# EAGLE board headstage-neuropix_via-reduce (EAGLE 8.3.2), part 1 of 2
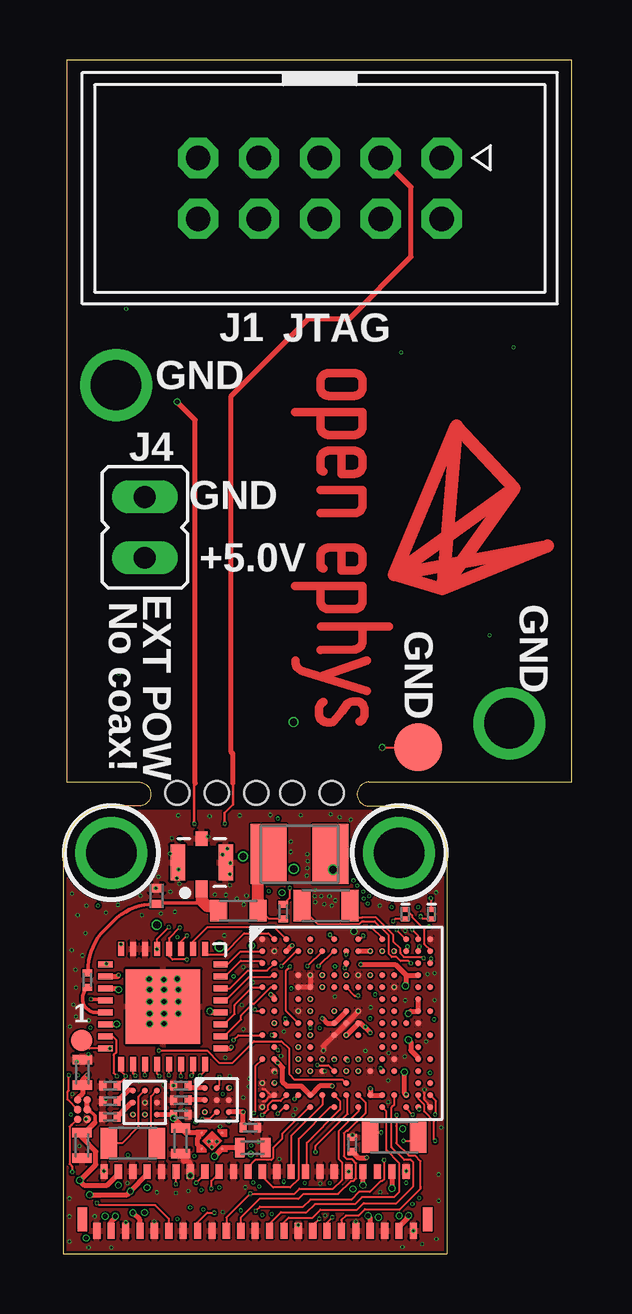
[diagram p0: board, top side]
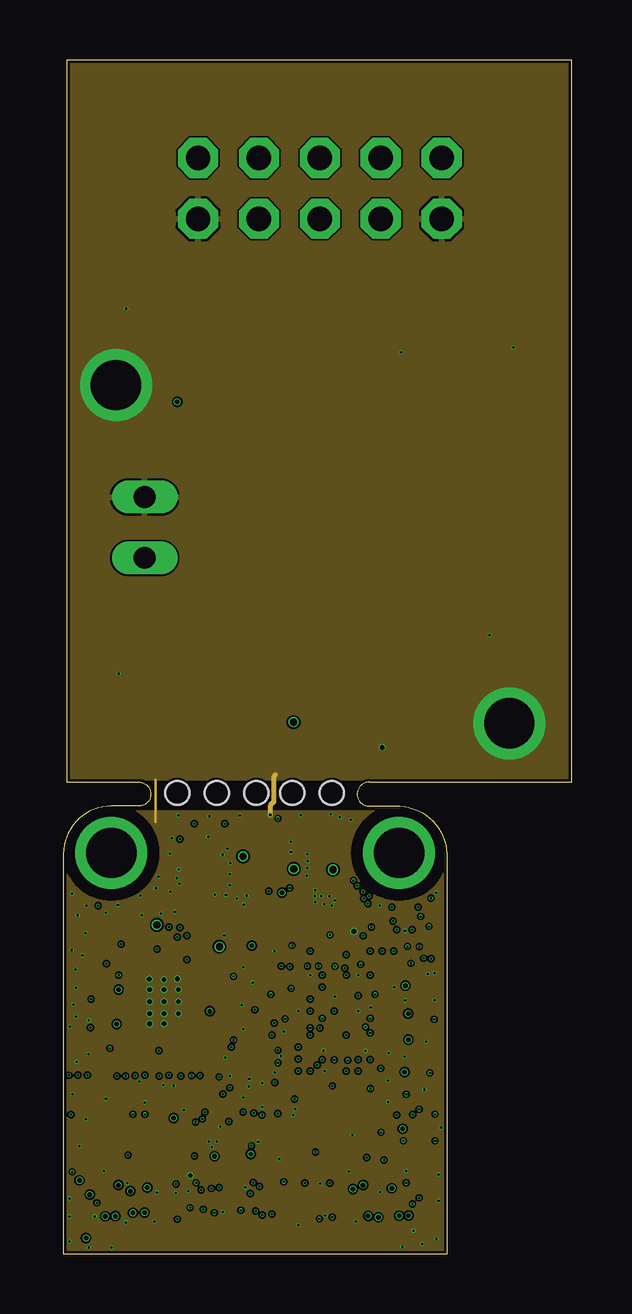
[diagram p1: board, inner layer GND1]
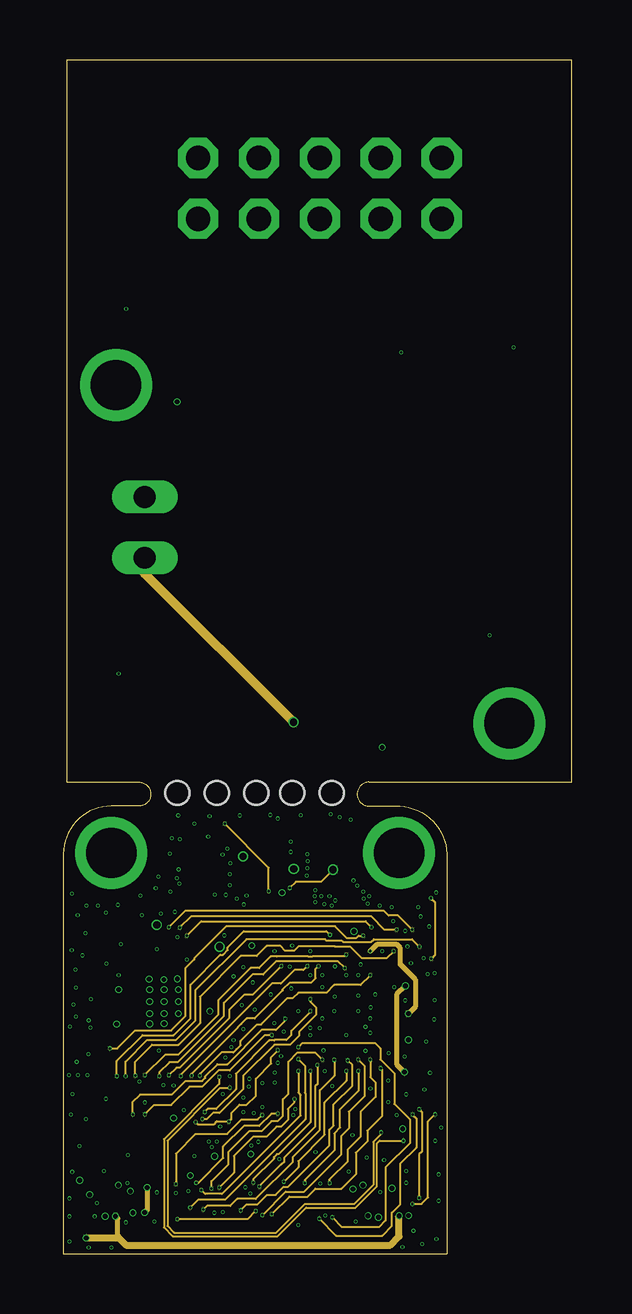
[diagram p2: board, inner layer Highspeed2]
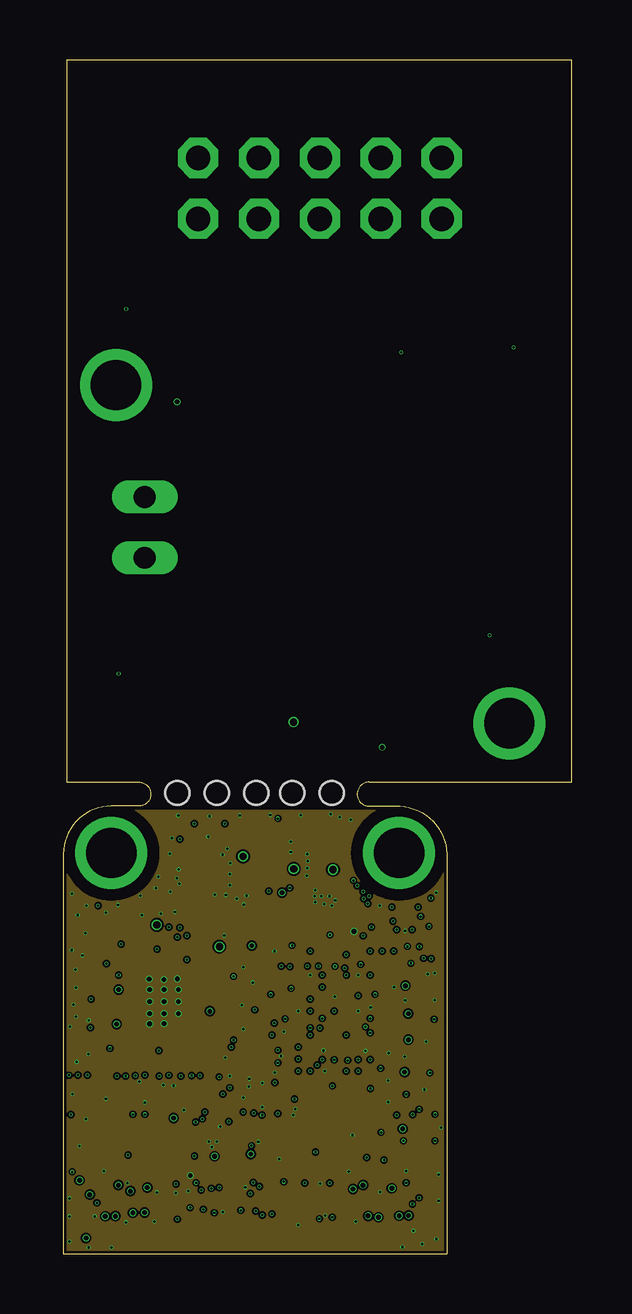
[diagram p3: board, inner layer GND2]
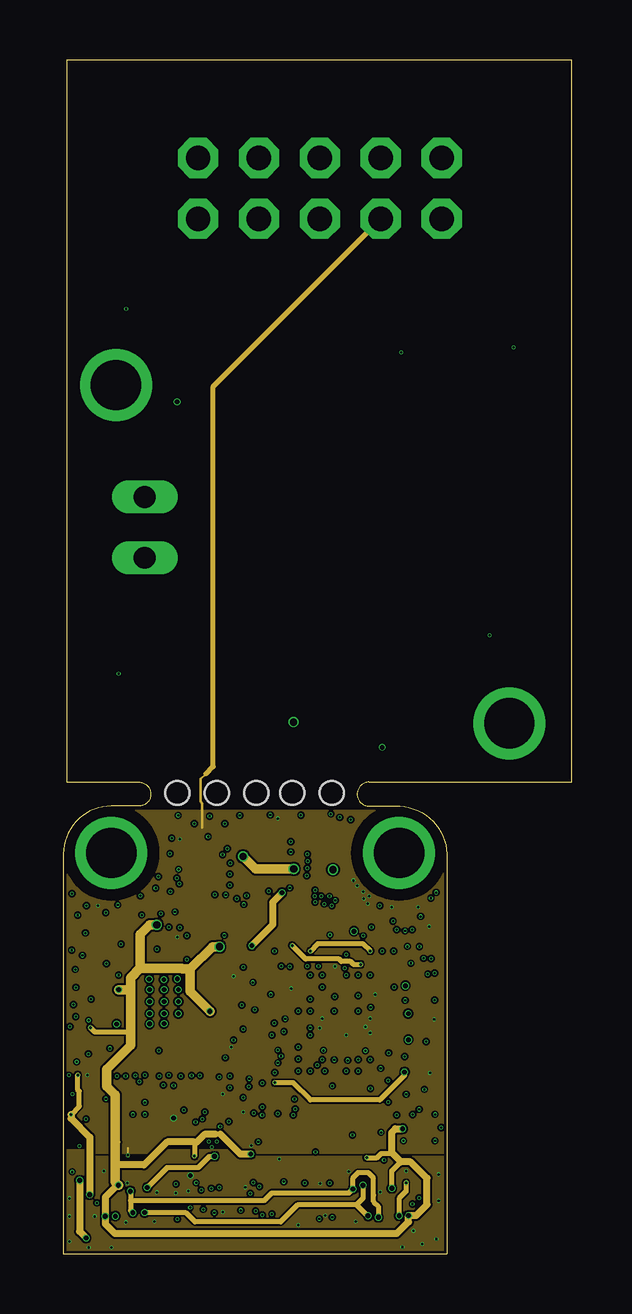
[diagram p4: board, inner layer VCC]
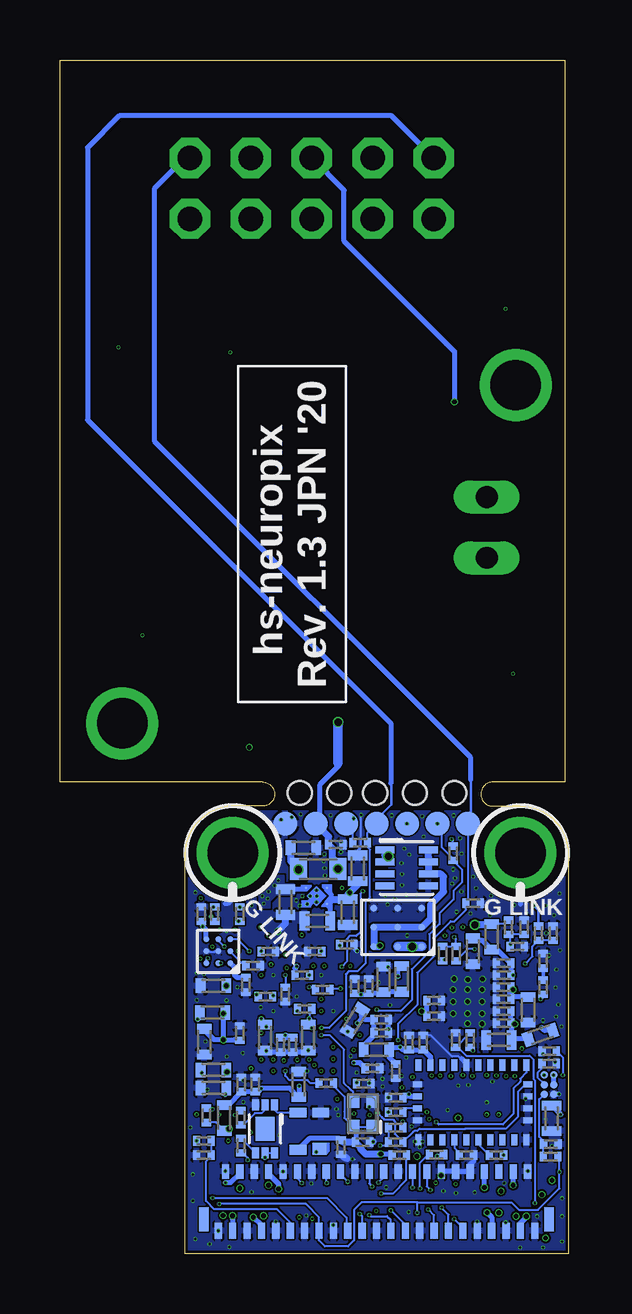
[diagram p5: board, bottom side, seen from below]

Size 21.2 x 49.75 mm. Coordinates in mm from the lower left corner, seen from the top.
Outline: 0.15,49.75 0.15,19.65 3.15,19.65 arc-90 3.65,19.15 arc-90 3.15,18.65 2,18.65 arc90 0,16.65 0,0 16,0 16,16.65 arc90 13.85,18.65 12.75,18.65 arc-90 12.25,19.15 arc-90 12.75,19.65 21.2,19.65 21.2,49.75 0.15,49.75
Copper layers (1*2*3+4*5*16): Highspeed1 0.036mm / dielectric 4mil / GND1 0.036mm / dielectric 5mil / Highspeed2 0.036mm / dielectric 0.10921875mm / GND2 0.036mm / dielectric 5mil / VCC 0.036mm / dielectric 4mil / LowSpeed 0.036mm
Design rules "speedy-6-layer-3mil-trace-space *": minimum track width 3mil, minimum drill 3mil, track to track 3mil, track to pad 3mil, pad to pad 3mil, via to via 3mil, smd to smd 2mil, copper to edge 5mil, drill to drill 5mil, minimum pad ring 2mil, minimum via ring 1mil, stop-mask expansion 0.005mm, vias tented up to drill 1mm, thermal gap 0.1mm
Net classes: 1 diff: width 0.09 mm, drill 0.2 mm, clearance 0.09 mm
Holes 1 mm at 8.05,19.2 4.75,19.2 6.4,19.2 9.55,19.2 11.2,19.2
tKeepout: area 12,14.7 to 16,18.7; area 0,14.7 to 4,18.7
bKeepout: area 11.9,14.6 to 16.1,18.8; area -0.1,14.6 to 4.1,18.8
tRestrict: area -0.1,14.6 to 4.1,18.8; area 11.9,14.6 to 16.1,18.8
bRestrict: area -0.1,14.6 to 4.1,18.8; area 11.9,14.6 to 16.1,18.8
vRestrict: area 11.9,14.6 to 16.1,18.8

## Footprints (pad centres in the part's own frame; a part is rotated, then mirrored left to right if it is on the bottom)
0201T = smd 0.3 x 0.4: 1 -0.3,0; 2 0.3,0
0402T = smd 0.4 x 0.6: 1 -0.533,0; 2 0.533,0
0402TW = smd 0.4 x 0.8: 1 -0.533,0; 2 0.533,0
LED-0201T = smd 0.2 x 0.35: 1 -0.2,0; 2 0.2,0
0402T-DFN = smd 0.35 x 0.6: A -0.325,0; C 0.325,0
0805PT-NOSILK = smd 0.7 x 1.3: A -1,0; C 1,0
2X05_IDC = drill 1.016 pad 1.676 octagon: 1 -5.08,-1.27; 2 -5.08,1.27; 3 -2.54,-1.27; 4 -2.54,1.27; 5 0,-1.27; 6 0,1.27; 7 2.54,-1.27; 8 2.54,1.27; 9 5.08,-1.27; 10 5.08,1.27
X_FL_R_SMT_1(02) = smd 0.5 x 0.7: P$1 0,-1.1 | smd 0.6 x 1.5: P$2 -1,0; P$4 1,0 | smd 0.5 x 0.6: P$3 0,1
1-2013496-8 = smd 0.3 x 0.65: 1 -6.6,0; 3 -6,0; 5 -5.4,0; 7 -4.8,0; 9 -4.2,0; 11 -3.6,0; 13 -3,0; 15 -2.4,0; 17 -1.8,0; 19 -1.2,0; 21 -0.6,0; 23 0,0; 25 0.6,0; 27 1.2,0; 29 1.8,0; 31 2.4,0; 33 3,0; 35 3.6,0; 37 4.2,0; 39 4.8,0; 41 5.4,0; 43 6,0; 45 6.6,0 | smd 0.3 x 0.6: 2 -6.3,2.475; 4 -5.7,2.475; 6 -5.1,2.475; 8 -4.5,2.475; 10 -3.9,2.475; 12 -3.3,2.475; 14 -2.7,2.475; 16 -2.1,2.475; 18 -1.5,2.475; 20 -0.9,2.475; 22 -0.3,2.475; 24 0.3,2.475; 26 0.9,2.475; 28 1.5,2.475; 30 2.1,2.475; 32 2.7,2.475; 34 3.3,2.475; 36 3.9,2.475; 38 4.5,2.475; 40 5.1,2.475; 42 5.7,2.475; 44 6.3,2.475 | smd 0.4 x 1: MECH1 -7.2,0.475; MECH2 7.2,0.475
JP2 = drill 0.914 long: 1 0,0; 2 2.54,0
0603T = smd 0.7 x 0.9: 1 -0.82,0; 2 0.82,0
1210T = smd 1.5 x 2.5: 1 -1.3,0; 2 1.3,0
TP10R = smd 1 x 1: TP 0,0
TP09R = smd 0.9 x 0.9: TP 0,0
TP20R = smd 2 x 2: TP 0,0
MBGA153-8X8 = smd 0.25 x 0.25: A1 -3.5,3.5; A2 -3,3.5; A3 -2.5,3.5; A5 -1.5,3.5; A7 -0.5,3.5; A9 0.5,3.5; A11 1.5,3.5; A13 2.5,3.5; A14 3,3.5; A15 3.5,3.5; B1 -3.5,3; B2 -3,3; B3 -2.5,3; B4 -2,3; B5 -1.5,3; B6 -1,3; B7 -0.5,3; B8 0,3; B9 0.5,3; B10 1,3; B11 1.5,3; B12 2,3; B13 2.5,3; B14 3,3; B15 3.5,3; C1 -3.5,2.5; C2 -3,2.5; C8 0,2.5; C14 3,2.5; C15 3.5,2.5; D2 -3,2; D4 -2,2; D5 -1.5,2; D6 -1,2; D7 -0.5,2; D8 0,2; D9 0.5,2; D10 1,2; D11 1.5,2; D12 2,2; D14 3,2; E1 -3.5,1.5; E2 -3,1.5; E4 -2,1.5; E5 -1.5,1.5; E6 -1,1.5; E7 -0.5,1.5; E8 0,1.5; E9 0.5,1.5; E10 1,1.5; E11 1.5,1.5; E12 2,1.5; E14 3,1.5; E15 3.5,1.5; F2 -3,1; F4 -2,1; F5 -1.5,1; F11 1.5,1; F12 2,1; F14 3,1; G1 -3.5,0.5; G2 -3,0.5; G4 -2,0.5; G5 -1.5,0.5; G7 -0.5,0.5; G8 0,0.5; G9 0.5,0.5; G11 1.5,0.5; G12 2,0.5; G14 3,0.5; G15 3.5,0.5; H2 -3,0; H3 -2.5,0; H4 -2,0; H5 -1.5,0; H7 -0.5,0; H8 0,0; H9 0.5,0; H11 1.5,0; H12 2,0; H13 2.5,0; H14 3,0; J1 -3.5,-0.5; J2 -3,-0.5; J4 -2,-0.5; J5 -1.5,-0.5; J7 -0.5,-0.5; J8 0,-0.5; J9 0.5,-0.5; J11 1.5,-0.5; J12 2,-0.5; J14 3,-0.5; J15 3.5,-0.5; K2 -3,-1; K4 -2,-1; K5 -1.5,-1; K11 1.5,-1; K12 2,-1; K14 3,-1; L1 -3.5,-1.5; L2 -3,-1.5; L4 -2,-1.5; L5 -1.5,-1.5; L6 -1,-1.5; L7 -0.5,-1.5; L8 0,-1.5; L9 0.5,-1.5; L10 1,-1.5; L11 1.5,-1.5; L12 2,-1.5; L14 3,-1.5; L15 3.5,-1.5; M2 -3,-2; M4 -2,-2; M5 -1.5,-2; M6 -1,-2; M7 -0.5,-2; M8 0,-2; M9 0.5,-2; M10 1,-2; M11 1.5,-2; M12 2,-2; M14 3,-2; N1 -3.5,-2.5; N2 -3,-2.5; N8 0,-2.5; N14 3,-2.5; N15 3.5,-2.5; P1 -3.5,-3; P2 -3,-3; P3 -2.5,-3; P4 -2,-3; P5 -1.5,-3; P6 -1,-3; P7 -0.5,-3; P8 0,-3; P9 0.5,-3; P10 1,-3; P11 1.5,-3; P12 2,-3; P13 2.5,-3; P14 3,-3; P15 3.5,-3; R1 -3.5,-3.5; R2 -3,-3.5; R3 -2.5,-3.5; R5 -1.5,-3.5; R7 -0.5,-3.5; R9 0.5,-3.5; R11 1.5,-3.5; R13 2.5,-3.5; R14 3,-3.5; R15 3.5,-3.5
ASCO = smd 0.6 x 0.5: 1 -0.55,-0.4; 2 0.55,-0.4; 3 0.55,0.4; 4 -0.55,0.4
UDFN8-2X2 = smd 0.8 x 0.3: 1 -0.91,0.75; 2 -0.91,0.25; 3 -0.91,-0.25; 4 -0.91,-0.75; 5 0.91,-0.75; 6 0.91,-0.25; 7 0.91,0.25; 8 0.91,0.75
WLCSP6-1X1.2-LP = smd 0.305 x 0.305: A1 -0.2,0.4; A2 0.2,0.4; B1 -0.2,0; B2 0.2,0; C1 -0.2,-0.4; C2 0.2,-0.4
WQFN32-5X5-LP = smd 0.25 x 0.6: 1 1.75,2.4; 2 1.25,2.4; 3 0.75,2.4; 4 0.25,2.4; 5 -0.25,2.4; 6 -0.75,2.4; 7 -1.25,2.4; 8 -1.75,2.4; 17 -1.75,-2.4; 18 -1.25,-2.4; 19 -0.75,-2.4; 20 -0.25,-2.4; 21 0.25,-2.4; 22 0.75,-2.4; 23 1.25,-2.4; 24 1.75,-2.4 | smd 0.6 x 0.25: 9 -2.4,1.75; 10 -2.4,1.25; 11 -2.4,0.75; 12 -2.4,0.25; 13 -2.4,-0.25; 14 -2.4,-0.75; 15 -2.4,-1.25; 16 -2.4,-1.75; 25 2.4,-1.75; 26 2.4,-1.25; 27 2.4,-0.75; 28 2.4,-0.25; 29 2.4,0.25; 30 2.4,0.75; 31 2.4,1.25; 32 2.4,1.75 | smd 3.1 x 3.1: PAD 0,0
X2SON = smd 0.1 x 0.1: 1 -0.43,0.33; 2 -0.43,-0.33; 3 0.43,-0.33; 4 0.43,0.33 | smd 0.1 x 0.1 rotated 45: PAD 0,0
MICROSIP9-3X2.3 = smd 0.3 x 0.3: A1 -1,0.8; A2 0,0.8; A3 1,0.8; B1 -1,0; B2 0,0; B3 1,0; C1 -1,-0.8; C2 0,-0.8; C3 1,-0.8
LGA-28-3.8X2.5-LP = smd 0.25 x 0.475: 1 -2.25,1.56; 6 -2.25,-1.56; 7 -1.75,-1.56; 8 -1.25,-1.56; 9 -0.75,-1.56; 10 -0.25,-1.56; 11 0.25,-1.56; 12 0.75,-1.56; 13 1.25,-1.56; 14 1.75,-1.56; 15 2.25,-1.56; 20 2.25,1.56; 21 1.75,1.56; 22 1.25,1.56; 23 0.75,1.56; 24 0.25,1.56; 25 -0.25,1.56; 26 -0.75,1.56; 27 -1.25,1.56; 28 -1.75,1.56 | smd 0.375 x 0.25: 2 -2.3,0.75; 3 -2.3,0.25; 4 -2.3,-0.25; 5 -2.3,-0.75; 16 2.3,-0.75; 17 2.3,-0.25; 18 2.3,0.25; 19 2.3,0.75
VFLGA4-2.0X1.6 = smd 0.5 x 0.57: 1 -0.725,-0.425 | smd 0.4 x 0.7: 2 0.775,-0.475; 3 0.775,0.475; 4 -0.775,0.475
DFN6_2X1.3_PAD = smd 0.45 x 0.3: 1 -1,0.4; 2 -1,0; 3 -1,-0.4; 4 1,-0.4; 5 1,0; 6 1,0.4 | smd 1 x 0.8: PAD 0,0
WLCSP3X3 = smd 0.25 x 0.25: A1 -0.5,0.5; A2 0,0.5; A3 0.5,0.5; B1 -0.5,0; B2 0,0; B3 0.5,0; C1 -0.5,-0.5; C2 0,-0.5; C3 0.5,-0.5

## Placement (x,y rotation side)
C1  22nF  [0201T]  9.24,12.88 0 bottom
C2  22nF  [0201T]  11.5,8.7 270 bottom
C3  0.1uF  [0201T]  8.53,7.08 0 bottom
C4  0.1uF  [0201T]  12,8.7 270 bottom
C5  4.7uF  [0402T]  14.8,11.16 180 bottom
C6  4.7uF  [0402T]  12.65,9 270 bottom
C7  10uF  [0402T]  14.8,6.9 180 bottom
C8  10uF  [0402T]  10.85,9 270 bottom
C9  22nF  [0201T]  8.17,7.72 0 bottom
C10  22nF  [0201T]  13.7,9.19 90 bottom
C11  10nF  [0201T]  8.58,4.64 180 bottom
C12  22nF  [0201T]  8.32,11.15 90 bottom
C13  22nF  [0201T]  7.8,9.75 0 bottom
C14  22nF  [0201T]  13.64,7.05 90 bottom
C15  22nF  [0201T]  12.51,12.59 0 bottom
C16  0.1uF  [0201T]  8.91,11.14 90 bottom
C17  0.1uF  [0201T]  7.8,9.2 0 bottom
C18  0.1uF  [0201T]  13.05,7.05 90 bottom
C19  0.1uF  [0201T]  10.58,12.59 180 bottom
C20  10uF  [0402T]  8.9,9.72 238.2 bottom
C21  10uF  [0402T]  11.25,7.05 90 bottom
C22  10uF  [0402T]  15.18,8.83 270 bottom
C23  10uF  [0402T]  7.71,11.43 90 bottom
C24  10uF  [0402TW]  0.8,7.55 90 top
C25  1uF  [0201T]  9.7,17.05 0 bottom
C26  10uF  [0402TW]  9.2,14.23 270 bottom
C27  0.1uF  [0201T]  7.2,6.5 180 bottom
C28  10uF  [0402TW]  8.78,16.06 90 bottom
C29  0.1uF  [0201T]  6.05,8.8 90 bottom
C30  1nF  [0201T]  0.8,8.44 180 bottom
C31  0.1uF  [0201T]  5.6,10.55 0 bottom
C32  0.1uF  [0201T]  7.2,7.6 270 bottom
C33  10uF  [0402TW]  0.78,4.51 270 top
C34  10nF  [0201T]  5.6,9.9 0 bottom
C35  10nF  [0201T]  6.65,8.8 90 bottom
C36  10uF  [0402TW]  10.47,13.86 180 bottom
C37  10uF  [0402TW]  4.89,4.7 270 top
C38  1uF  [0201T]  0.73,4.56 0 bottom
C39  0.1uF  [0201T]  4.25,4.1 180 bottom
C40  10nF  [0201T]  2.7,12.1 180 bottom
C41  10nF  [0201T]  2.7,11.1 180 bottom
C42  10nF  [0201T]  2.7,10.1 180 bottom
C43  1nF  [0201T]  0.8,7.92 0 bottom
C44  0.1uF  [0201T]  2.7,11.6 180 bottom
C45  0.1uF  [0201T]  2.7,10.6 180 bottom
C46  0.1uF  [0201T]  2.7,9.6 180 bottom
C47  10uF  [0402TW]  11.8,14.65 270 bottom
C48  10uF  [0402TW]  7.9,4.42 0 top
C49  0.1uF  [0201T]  1,11.4 270 top
C50  47nF  [0201T]  1.05,11.1 270 bottom
C51  10uF  [0402TW]  0.7,5.64 270 bottom
C52  4.7uF  [0402T]  3.98,12.6 270 bottom
C53  10uF  [0402T]  1.68,10.16 270 bottom
C54  10uF  [0402TW]  2.9,8.9 180 bottom
C55  1uF  [0201T]  0.63,13.35 90 bottom
C56  10nF  [0201T]  9.48,4.43 90 bottom
C57  0.1uF  [0201T]  2.13,12.8 0 bottom
C58  10uF  [0402T]  11.05,16.91 0 bottom
C59  10nF  [0201T]  12.05,4.55 270 top
C60  1uF  [0201T]  1.95,6.35 180 top
C61  1uF  [0201T]  4.9,7 180 top
C62  1uF  [0201T]  13.45,11.2 270 bottom
C63  0.1uF  [0201T]  4.9,5.8 0 top
C64  0.1uF  [0201T]  7.8,5.25 0 top
C65  0.1uF  [0201T]  15.3,14.15 90 bottom
D1  XZVGR155W  [LED-0201T]  15.35,14.15 270 top
D2  XZVGR155W  [LED-0201T]  14.25,14.15 270 top
D3  SESD0402X1UN-0020-090  [0402T-DFN]  3.89,14.9 270 top
D4  VEMD1160X01  [0805PT-NOSILK]  2.9,4.6 0 top
D5  VEMD1160X01  [0805PT-NOSILK]  13.8,4.85 180 top
D6  VEMD1160X01  [0805PT-NOSILK]  10.95,14.5 0 top
J1  302-S101  [2X05_IDC]  10.7,44.4 180 top
J2  X.FL-R-SMT-1(02)  [X_FL_R_SMT_1(02)]  5.77,16.3 0 top
J3  1-2013496-8  [1-2013496-8]  8,0.95 0 top
J4  77311-118-02LF  [JP2]  3.4,29 90 top
J5  1-2013496-8  [1-2013496-8]  8,0.95 0 bottom
L1  BLM15PX601SN1D  [0402T]  14.8,7.65 0 bottom
L2  BLM15PX601SN1D  [0402T]  6.95,11.44 270 bottom
L3  BLM15PX601SN1D  [0402T]  8,8.5 180 bottom
L4  BLM15PX601SN1D  [0402T]  14.35,5.65 90 bottom
L5  BLM15PX601SN1D  [0402T]  14.84,10.05 0 bottom
L6  BLM15PX601SN1D  [0402T]  3.2,13.2 270 bottom
L7  BLM15PX601SN1D  [0402T]  1.16,9.12 198.9 bottom
L8  BLM18KG601SN1D  [0603T]  10.43,16.03 0 bottom
L9  ADL3225V-470MT-TL000  [1210T]  9.85,16.65 0 top
L10  MPZ1608S102ATA00  [0603T]  7.3,14.3 0 top
R1  4.7k  [0201T]  7.2,4.65 180 bottom
R2  4.7k  [0201T]  7.2,5.25 180 bottom
R3  2k  [0201T]  14.75,14.15 270 bottom
R4  4.7k  [0201T]  10.1,7.1 0 bottom
R5  10k  [0201T]  11,10.2 180 bottom
R6  2k  [0201T]  13.7,14.15 270 bottom
R7  4.7k  [0201T]  15.1,5.76 270 bottom
R8  10k  [0201T]  4.81,16.68 270 bottom
R9  1k  [0201T]  3.97,14.6 0 bottom
R10  4.7k  [0201T]  5.5,4.12 0 bottom
R11  4.7k  [0201T]  5.24,12.5 90 bottom
R12  10k  [0201T]  11.8,10.8 270 bottom
R13  10k  [0201T]  8.68,17.13 0 bottom
R14  4.7k  [0201T]  7.05,4.1 180 bottom
R15  4.7k  [0201T]  4.68,12.5 90 bottom
R16  10k  [0201T]  12.63,10.71 0 bottom
R17  10k  [0201T]  11.1,11.6 0 bottom
R18  10k  [0201T]  10.25,11 180 bottom
R19  10k  [0201T]  1.95,7 180 top
R20  10k  [0201T]  3,4.1 0 bottom
R21  6.6k  [0201T]  0.74,4.04 0 bottom
R22  10k  [0201T]  1.25,13.35 270 bottom
R23  49.9  [0201T]  1.05,12.2 270 bottom
R24  10k  [0201T]  7.2,5.9 0 bottom
R25  10k  [0201T]  2.5,13.6 270 bottom
R26  100k  [0201T]  1.85,13.6 90 bottom
R27  2k  [0201T]  9.17,14.25 90 top
R28  22  [0201T]  13.65,4.5 270 bottom
R29  20k  [0201T]  4.1,8.9 90 bottom
R30  100  [0201T]  4.7,8.9 90 bottom
R31  22  [0201T]  13.66,5.66 90 bottom
R32  15k  [0201T]  1.95,5.7 0 top
R33  15k  [0201T]  4.9,6.4 0 top
R34  15k  [0201T]  13.15,12 180 bottom
R35  20k  [0201T]  15.2,4.7 0 bottom
R36  100  [0201T]  15.2,4.1 180 bottom
TP1  [TP10R]  10.54,17.92 180 bottom
TP2  [TP10R]  5.46,17.92 180 bottom
TP3  [TP10R]  4.19,17.92 180 bottom
TP4  [TP10R]  8,17.92 180 bottom
TP5  [TP10R]  6.73,17.92 180 bottom
TP6  [TP10R]  9.27,17.92 180 bottom
TP7  [TP10R]  11.81,17.92 180 bottom
TP10  [TP09R]  0.76,8.88 0 top
TP13  [TP20R]  14.8,21.1 270 top
U1  10M08SAM15317G  [MBGA153-8X8]  11.8,9.6 0 top
U2  ASCO2-24.000MHZ-EK-T3  [ASCO]  8.57,5.83 90 bottom
U3  MAX4945AELA+T  [UDFN8-2X2]  6.74,16.07 0 bottom
U4  ADP7112ACBZ-1.8-R7  [WLCSP6-1X1.2-LP]  0.8,6 0 top
U5  DS90UB933_WQFN  [WQFN32-5X5-LP]  4.16,10.3 0 top
U6  NCP161BMX330  [X2SON]  10.5,14.9 0 bottom
U7  TPS8268180  [MICROSIP9-3X2.3]  7.11,13.6 180 bottom
U8  TLV70712  [X2SON]  6.2,4.7 180 top
U9  ADP7112ACBZ-1.2-R7  [WLCSP6-1X1.2-LP]  0.81,7.04 0 bottom
U10  BNO055_LP  [LGA-28-3.8X2.5-LP]  4,6.3 0 bottom
U11  DSC6102MI2A-093.6000  [VFLGA4-2.0X1.6]  10.8,5.1 90 bottom
U12  PL133-27GC-R  [DFN6_2X1.3_PAD]  12.65,5.2 270 bottom
U13  TS4231  [WLCSP3X3]  3.4,6.3 0 top
U14  TS4231  [WLCSP3X3]  6.4,6.4 0 top
U15  TS4231  [WLCSP3X3]  14.6,12.6 180 bottom
X2  OE-LOGO_14X10  [OE-LOGO-14X10]  13.4,30.1 270 top

## Library data of the parts
C1-C59 D1-D6 J1-J5 L1-L10 R1-R36 TP1-TP7 TP10 TP13 U1-U15 X2 = jonnew
C60-C62 = jonnew; PARTNO: CL03A105MP3ZSNH
C63-C65 = jonnew; PARTNO: C0603X5R1C104K030BC

## Nets
1V2A: C51.1 J3.7 J3.8 J5.7 J5.8 U9.A2 U9.B2
1V8A: C33.1 J3.3 J3.4 J5.3 J5.4 U4.A2 U4.B2
24MHZ_P: U1.J5 U2.3
!IMU_BL: R24.2 U10.4
!IMU_RESET: R20.1 U10.11
+1V2: C48.1 J3.38 J3.39 J5.38 J5.39 U8.1
+1V8: C11.2 C31.1 C34.1 C41.1 C45.1 C53.1 C56.2 C59.2 J3.42 J3.43 J5.42 J5.43 L4.1 L6.1 L7.1 R4.2 R7.2 R10.2 R14.2 R25.1 U2.1 U2.4 U5.11 U5.28 U7.A1 U7.A2 U11.4 U12.5 U12.6
+3V3: C2.1 C4.1 C6.1 C8.1 C24.1 C27.1 C29.1 C32.1 C35.1 C37.1 C47.1 C63.1 C64.1 C65.1 J1.4 L1.1 L2.1 L3.1 L5.1 R1.2 R2.2 R3.1 R5.1 R6.1 R8.1 R11.2 R13.1 R15.2 R16.1 R17.1 R18.1 R20.2 R22.1 R24.1 TP6.TP U1.G8 U1.H7 U1.H9 U1.J8 U4.A1 U5.25 U6.1 U8.3 U8.4 U9.A1 U10.3 U10.28 U13.C3 U14.C3 U15.C3
BNO_SCL: R1.1 U1.L1 U10.19
BNO_SDA: R2.1 U1.K2 U10.20
CAL_A_1KHZ: R29.1 U1.N8
CAL_B_1KHZ: R35.1 U1.P14
CAL_SIGNAL_A: J3.11 R29.2 R30.1
CAL_SIGNAL_A1: J5.11 R35.2 R36.1
CONF_DONE: R18.2 U1.E6
CONFIG_SEL: R12.1 U1.D8
GND: C1.2 C2.2 C3.2 C4.2 C5.2 C6.2 C7.2 C8.2 C9.2 C10.2 C11.1 C12.2 C13.2 C14.2 C15.2 C16.2 C17.2 C18.2 C19.2 C20.2 C21.2 C22.2 C23.2 C24.2 C25.2 C26.2 C27.2 C28.2 C29.2 C30.2 C31.2 C32.2 C33.2 C34.2 C35.2 C36.2 C37.2 C38.2 C39.1 C40.2 C41.2 C42.2 C43.2 C44.2 C45.2 C46.2 C47.2 C48.2 C51.2 C52.2 C53.2 C54.2 C55.2 C56.1 C57.2 C58.2 C59.1 C60.2 C61.2 C62.2 C63.2 C64.2 C65.2 D3.A J1.2 J1.10 J2.P$2 J2.P$3 J2.P$4 J3.1 J3.2 J3.5 J3.6 J3.9 J3.10 J3.13 J3.14 J3.17 J3.20 J3.23 J3.26 J3.29 J3.32 J3.34 J3.36 J3.37 J3.41 J3.44 J3.45 J4.2 J5.1 J5.2 J5.5 J5.6 J5.9 J5.10 J5.13 J5.14 J5.17 J5.20 J5.23 J5.26 J5.29 J5.32 J5.34 J5.36 J5.37 J5.41 J5.44 J5.45 R9.2 R12.2 R19.2 R23.1 R26.2 R30.2 R32.1 R33.1 R34.1 R36.2 TP7.TP TP13.TP U1.A1 U1.A15 U1.B2 U1.D4 U1.D5 U1.D9 U1.E4 U1.E5 U1.E12 U1.G4 U1.G9 U1.H8 U1.H14 U1.J7 U1.L12 U1.M2 U1.M6 U1.M10 U1.N1 U1.P2 U1.R1 U1.R15 U2.2 U3.5 U4.C2 U5.6 U5.7 U5.PAD U6.2 U6.PAD U7.C1 U7.C2 U7.C3 U8.2 U8.PAD U9.C2 U10.2 U10.5 U10.6 U10.15 U10.16 U10.17 U10.18 U10.25 U11.2 U12.3 U13.B2 U13.B3 U14.B2 U14.B3 U15.B2 U15.B3
I2C_SCL_A: J3.19 R14.1 U1.R9
I2C_SCL_B: J5.19 R7.1 U1.R14
I2C_SDA_A: J3.18 R10.1 U1.L6
I2C_SDA_B: J5.18 R4.1 U1.M8
JTAGEN: R5.2 U1.G7
LH_DATA0: U1.G5 U14.C1
LH_DATA1: U1.H3 U13.C1
LH_DATA2: U1.B11 U15.C1
LH_ENV0: U1.F5 U14.C2
LH_ENV1: U1.J2 U13.C2
LH_ENV2: U1.B13 U15.C2
MIDFILT: L9.1 L10.2 R27.1
N$1: U11.3 U12.1
N$2: R28.1 U12.4
N$3: J3.35 R31.2
N$4: C13.1 C17.1 C20.1 L3.2 U1.H2
N$5: J5.35 R28.2
N$6: R31.1 U12.2
N$7: D4.C U13.A3
N$8: D4.A U13.A2
N$9: R32.2 U13.B1
N$12: C60.1 U13.A1
N$13: C58.1 L8.1 L9.2 R27.2
N$14: D5.C U14.A3
N$15: D5.A U14.A2
N$16: R33.2 U14.B1
N$26: D6.C U15.A3
N$27: D6.A U15.A2
N$28: C49.2 U5.13
N$29: R34.2 U15.B1
N$30: C55.1 R22.2 U5.9
N$31: C50.2 U5.12
N$32: C50.1 R23.2
N$33: C57.1 R25.2 R26.1 U5.8
N$34: C40.1 C44.1 C52.1 L6.2 U5.10
N$35: C42.1 C46.1 C54.1 L7.2 U5.14
N$36: C61.1 U14.A1
N$37: C62.1 U15.A1
N$38: C26.1 C28.1 C36.1 U3.6 U3.7 U3.8 U6.3 U6.4 U7.A3 U7.B1 U7.B2 U7.B3
N$39: C30.1 U4.B1
N$40: C43.1 U9.B1
N$41: C38.1 R21.1 U9.C1
N$67: C39.2 U10.9
N$92: D2.2 R6.2
N$93: D1.2 R3.2
NCONFIG: R16.2 U1.E8
NP_OSC_EN: U1.P8 U11.1
NRST: J3.15 J5.15 R21.2 U1.P15 U4.C1
NSTATUS: R17.2 U1.D6
OSC_PDOWN_N_A: J3.12 U1.P3
OSC_PDOWN_N_B: J5.12 U1.L10
PSB_CLK_A: J3.33 U1.K4
PSB_CLK_B: J5.33 U1.L4
PSB_DATA_0_A: J3.31 U1.R13
PSB_DATA_0_B: J5.31 U1.L7
PSB_DATA_1_A: J3.30 U1.P7
PSB_DATA_1_B: J5.30 U1.M4
PSB_DATA_2_A: J3.28 U1.P6
PSB_DATA_2_B: J5.28 U1.P4
PSB_DATA_3_A: J3.27 U1.P12
PSB_DATA_3_B: J5.27 U1.L8
PSB_DATA_4_A: J3.25 U1.R11
PSB_DATA_4_B: J5.25 U1.L9
PSB_DATA_5_A: J3.24 U1.R7
PSB_DATA_5_B: J5.24 U1.M5
PSB_DATA_6_A: J3.22 U1.R5
PSB_DATA_6_B: J5.22 U1.M7
PSB_SYNC_A: J3.21 U1.P9
PSB_SYNC_B: J5.21 U1.M11
REC_NRST_A: J3.16 U1.R3
REC_NRST_B: J5.16 U1.M9
SER_DIN0: U1.B8 U5.19
SER_DIN1: U1.C8 U5.20
SER_DIN2: U1.B4 U5.21
SER_DIN3: U1.B6 U5.22
SER_DIN4: U1.B7 U5.23
SER_DIN5: U1.D10 U5.24
SER_DIN6: U1.E2 U5.26
SER_DIN7: U1.E1 U5.27
SER_DIN8: U1.D2 U5.29
SER_DIN9: U1.C2 U5.30
SER_DIN10: U1.C1 U5.31
SER_DIN11: U1.B1 U5.32
SER_GPIO0: U1.A7 U5.15
SER_GPIO1: TP10.TP U1.A9 U5.16
SER_GPIO2: R19.1 U1.B14 U5.17
SER_GPIO3: U1.B12 U5.18
SER_HSYNC: U1.A2 U5.1
SER_PCLK: U1.A11 U5.3
SER_SCL: R11.1 U1.A13 U5.4
SER_SDA: R15.1 U1.A14 U5.5
SER_VSYNC: U1.A3 U5.2
SIGOUT: C49.1 D3.C J2.P$1 L10.1
STATUS_A: D1.1 U1.C15
STATUS_B: D2.1 U1.B15
TCK: J1.1 R9.1 TP3.TP U1.J1
TDI: J1.9 R13.2 TP4.TP U1.H5
TDO: J1.3 TP5.TP U1.H4
TMS: J1.5 R8.2 TP2.TP U1.G1
VCCA: C1.1 C3.1 C5.1 C7.1 L1.2 U1.B3 U1.D14 U1.N2 U1.P13
VCCIO: C10.1 C15.1 C19.1 C22.1 L5.2 U1.B5 U1.B9 U1.B10 U1.F14 U1.G14 U1.L14
VCCIO2: C9.1 C14.1 C18.1 C21.1 L4.2 U1.L2 U1.P5 U1.P10 U1.P11
VCCIOA: C12.1 C16.1 C23.1 L2.2 U1.F2
VCOAX: C25.1 J4.1 L8.2 TP1.TP U3.1 U3.2

## Tracks (layer width: path | path; a pad name or v marks a point on that pad's centre or on a via)
1V2A  (via drill 0.1, 0.2)
  Highspeed1 0.2: J3.8 3.5,3.3 v2.8,2.6 2.65,2.45 v1.1,2.45 | J3.7 3.2,1.4 v2.9,1.7
  VCC 0.2: v2.8,2.6 2.8,2.2 | U9.A2 0.61,6.82 0.67,6.76 0.67,6.14 v0.32,5.79 | 2.8,2.2 8.37,2.2 8.7,2.53 11.91,2.53 v12.08,2.69 12.08,3.16 12.29,3.37 12.71,3.37 12.93,3.15 12.93,2.46 12.94,2.45 12.94,2.16 13.14,1.96 v13.14,1.51 | 2.8,2.2 2.8,1.8 v2.9,1.7
  VCC 0.3: v1.1,2.45 1.1,4.85 0.32,5.63 v0.32,5.79
  LowSpeed 0.2: U9.B2 U9.A2 | v0.32,5.79 C51.1 | J5.7 12.8,1.17 v13.14,1.51 | J5.8 12.5,3.33 12.08,2.91 v12.08,2.69
  other vias: 0.61,7.44
  pour VCC (no thermals): 2.67,2.6 arc180 2.93,2.6 arc180
  pour Highspeed1 (no thermals): 2.67,2.6 arc180 2.93,2.6 arc180
  pour Highspeed1 (no thermals): 2.67,2.6 arc180 2.93,2.6 arc180
  pour Highspeed1 (no thermals): 2.77,1.7 arc180 3.03,1.7 arc180
  pour VCC (no thermals): 2.77,1.7 arc180 3.03,1.7 arc180
  pour LowSpeed (no thermals): 13.01,1.51 arc180 13.27,1.51 arc180
  pour VCC (no thermals): 13.01,1.51 arc180 13.27,1.51 arc180
  pour VCC (no thermals): 11.95,2.69 arc180 12.21,2.69 arc180
  pour LowSpeed (no thermals): 11.95,2.69 arc180 12.21,2.69 arc180
  pour VCC (no thermals): 11.95,2.69 arc180 12.21,2.69 arc180
  pour LowSpeed (no thermals): 0.24,5.79 arc180 0.4,5.79 arc180
  pour VCC (no thermals): 0.24,5.79 arc180 0.4,5.79 arc180
  pour VCC (no thermals): 0.24,5.79 arc180 0.4,5.79 arc180
  pour VCC (no thermals): 0.98,2.45 arc180 1.23,2.45 arc180
  pour Highspeed1 (no thermals): 0.98,2.45 arc180 1.23,2.45 arc180
  pour LowSpeed (no thermals): 0.53,7.44 arc180 0.69,7.44 arc180
  pour VCC (no thermals): 0.53,7.44 arc180 0.69,7.44 arc180
1V8A  (via drill 0.1, 0.2)
  Highspeed1 0.15: 1.33,5.46 1.33,5.74 1.07,6
  Highspeed1 0.2: 1.33,5.46 0.91,5.04 C33.1 0.78,4.83 1.36,4.25 1.36,3.7 0.7,3.05 v0.68,3.05 0.9,2.83 1.24,2.83 1.8,2.83 2.3,3.33 J3.4 | U4.A2 U4.B2 1.07,6 | J3.3 2,1.34 2.18,1.51 v2.18,1.56
  Highspeed2 0.2: 2.27,0.7 2.27,1.47 v2.18,1.56
  Highspeed2 0.3: v14,1.57 14,0.71 13.64,0.35 2.62,0.35 2.27,0.7 2.22,0.65 v0.95,0.65
  VCC 0.2: v14,1.57 14,2.3 14.29,2.59 v14.29,2.95
  VCC 0.3: v0.95,0.65 0.68,0.92 v0.68,3.05
  LowSpeed 0.2: 14,1.43 J5.3 | 14,1.43 14,1.52 | v14.29,2.95 14.08,2.95 13.7,3.33 J5.4 | v14,1.57 14,1.43
  pour Highspeed1 (no thermals): 0.55,3.05 arc180 0.81,3.05 arc180
  pour Highspeed1 (no thermals): 0.55,3.05 arc180 0.81,3.05 arc180
  pour VCC (no thermals): 0.55,3.05 arc180 0.81,3.05 arc180
  pour VCC (no thermals): 0.82,0.65 arc180 1.08,0.65 arc180
  pour Highspeed2 (no thermals): 0.82,0.65 arc180 1.08,0.65 arc180
  pour Highspeed2 (no thermals): 13.88,1.57 arc180 14.13,1.57 arc180
  pour VCC (no thermals): 13.88,1.57 arc180 14.13,1.57 arc180
  pour LowSpeed (no thermals): 13.88,1.57 arc180 14.13,1.57 arc180
  pour Highspeed1 (no thermals): 2.05,1.56 arc180 2.3,1.56 arc180
  pour Highspeed2 (no thermals): 2.05,1.56 arc180 2.3,1.56 arc180
  pour VCC (no thermals): 14.22,2.95 arc180 14.37,2.95 arc180
  pour LowSpeed (no thermals): 14.22,2.95 arc180 14.37,2.95 arc180
24MHZ_P  (via drill 0.1)
  LowSpeed 0.076: U1.J5 9.95,9.1 9.36,8.51 9.36,7.1 9.09,6.84 9.09,6.83 8.97,6.71 U2.3
  other vias: 10.3,9.1
  pour LowSpeed (no thermals): 10.22,9.1 arc180 10.38,9.1 arc180
!IMU_BL
  LowSpeed 0.076: U10.4 6.75,6.05 R24.2
!IMU_RESET
  LowSpeed 0.076: U10.11 3.75,4.55 R20.1
+1V2  (via drill 0.2)
  Highspeed1 0.076: 6.86,4.42 6.81,4.37 U8.1
  Highspeed1 0.2: v12.5,2.85 J3.38 | 6.86,4.42 C48.1 | U8.1 v6.31,4.05 | J3.39 12.8,1.48 v12.71,1.57
  Highspeed2 0.2: v3.39,1.71 3.5,1.82 v3.5,2.75
  VCC 0.2: v6.31,4.05 6.1,4.05 5.62,3.58 4.33,3.58 v3.5,2.75 | v3.39,1.71 5.1,1.71 5.5,1.31 9.06,1.31 9.78,2.03 12.22,2.03 | v12.71,1.57 12.68,1.57 12.22,2.03 | v12.5,2.85 12.5,2.31 12.22,2.03
  LowSpeed 0.2: v3.5,2.75 J5.38 | J5.39 3.2,1.52 v3.39,1.71
  pour Highspeed1 (no thermals): 12.58,1.57 arc180 12.84,1.57 arc180
  pour VCC (no thermals): 12.58,1.57 arc180 12.84,1.57 arc180
  pour Highspeed2 (no thermals): 3.26,1.71 arc180 3.52,1.71 arc180
  pour LowSpeed (no thermals): 3.26,1.71 arc180 3.52,1.71 arc180
  pour VCC (no thermals): 3.26,1.71 arc180 3.52,1.71 arc180
  pour LowSpeed (no thermals): 3.37,2.75 arc180 3.63,2.75 arc180
  pour Highspeed2 (no thermals): 3.37,2.75 arc180 3.63,2.75 arc180
  pour VCC (no thermals): 3.37,2.75 arc180 3.63,2.75 arc180
  pour Highspeed1 (no thermals): 12.37,2.85 arc180 12.63,2.85 arc180
  pour VCC (no thermals): 12.37,2.85 arc180 12.63,2.85 arc180
  pour Highspeed1 (no thermals): 6.18,4.05 arc180 6.44,4.05 arc180
  pour VCC (no thermals): 6.18,4.05 arc180 6.44,4.05 arc180
+1V8  (via drill 0.1, 0.2, 0.3)
  Highspeed1 0.2: U5.28 6.16,10.05 v6.11,10.1 | U5.11 2.31,11.05 v2.31,11 | J3.42 v13.7,2.72 | C59.2 12.3,4 v12.65,4 | v14.4,1.58 14.33,1.51 14.33,1.44 14,1.11 J3.43
  VCC 0.2: 5.45,4.65 5.47,4.63 v5.47,4.06 | 6.35,4.99 6.54,4.99 6.55,4.97 | 2.78,8.9 2.81,8.87 | v1.13,9.42 1.31,9.23 2.73,9.23 2.81,9.31 | v12.65,4 13.08,4 13.26,4.17 13.68,4.17 13.7,4.19 | v13.7,2.72 13.7,3.45 14.07,3.82
  VCC 0.3: v14.15,5.2 13.85,5.2 13.7,5.05 13.7,4.19 14.07,3.82 14.48,3.82 15.16,3.14 15.16,2.03 14.71,1.58 v14.4,1.58 14.4,1.32 13.91,0.83 2.15,0.83 1.75,1.23 v1.75,1.55 1.75,2.35 2.25,2.85 v2.3,2.85 | v7.82,4.15 7.37,4.15 6.55,4.97 | 6.35,4.99 5.92,4.99 5.58,4.65 5.45,4.65 4.33,4.65 3.37,3.69 2.16,3.69 | 2.23,4.65 2.16,4.72
  VCC 0.4: 2.81,11 2.81,11.5 3.21,11.9 | 2.81,11 2.81,9.31 2.81,8.87 2.81,8.68 1.8,7.67 1.8,6.96 2.16,6.61 2.16,4.72 2.16,3.69 2.16,2.99 v2.3,2.85 | v2.31,11 2.81,11 | 3.21,11.9 3.21,13.31 3.6,13.7 v3.9,13.7 | 5.29,11.87 5.29,10.92 v6.11,10.1 | 5.29,11.87 5.3,11.88 5.31,11.88 6.22,12.79 v6.51,12.79 | 5.29,11.87 4.96,11.87 4.96,11.88 3.23,11.88 3.21,11.9
  LowSpeed 0.076: L4.1 14.69,5.46 R7.2 | R25.1 2.67,13.73 L6.1 | U2.1 8.84,5.28 U2.4 9.35,5.66 9.35,5.92 9.33,5.93 9.33,6.53 9.8,7 R4.2 | 8.85,4.67 C11.2 | U12.5 U12.6
  LowSpeed 0.15: 12.65,4.35 U12.5 | L4.1 14.17,5.12 14.15,5.1
  LowSpeed 0.2: 5.9,10.1 C31.1 | 5.9,10.1 C34.1 | v6.11,10.1 5.9,10.1 | v2.3,2.85 J5.42 | v7.82,4.15 7.4,4.15 R14.2 | R10.2 5.26,4.06 v5.47,4.06 | U12.5 v12.65,4 | 2,0.85 J5.43 2,1.27 1.75,1.52 v1.75,1.55 | 8.85,5.16 U2.4 8.81,5.28 | C11.2 8.84,4.68 8.84,5.28 | C53.1 2.31,10.69 C45.1 | U11.4 10.8,4.8 9.55,4.8 C56.2 | L7.1 1,9.29 v1.13,9.42
  LowSpeed 0.203: C41.1 v2.31,11
  LowSpeed 0.3: L6.1 3.23,13.7 v3.9,13.7 | C45.1 C41.1 | L4.1 14.23,5.12 v14.15,5.2 | C56.2 9.39,4.64 C11.2 8.66,4.42 8.66,4.35 8.46,4.15 v7.82,4.15
  LowSpeed 0.4: 6.52,12.8 U7.A2 | 6.52,12.8 v6.51,12.79 | U7.A1 6.52,12.8
  pour Highspeed1 (no thermals): 5.99,10.1 arc180 6.24,10.1 arc180
  pour LowSpeed (no thermals): 5.99,10.1 arc180 6.24,10.1 arc180
  pour VCC (no thermals): 5.99,10.1 arc180 6.24,10.1 arc180
  pour Highspeed1 (no thermals): 2.18,11 arc180 2.43,11 arc180
  pour VCC (no thermals): 2.18,11 arc180 2.43,11 arc180
  pour LowSpeed (no thermals): 2.18,11 arc180 2.43,11 arc180
  pour LowSpeed (no thermals): 3.7,13.7 arc180 4.1,13.7 arc180
  pour VCC (no thermals): 3.7,13.7 arc180 4.1,13.7 arc180
  pour LowSpeed (no thermals): 1.05,9.42 arc180 1.2,9.42 arc180
  pour VCC (no thermals): 1.05,9.42 arc180 1.2,9.42 arc180
  pour LowSpeed (no thermals): 2.17,2.85 arc180 2.43,2.85 arc180
  pour VCC (no thermals): 2.17,2.85 arc180 2.43,2.85 arc180
  pour VCC (no thermals): 2.17,2.85 arc180 2.43,2.85 arc180
  pour Highspeed1 (no thermals): 13.57,2.72 arc180 13.83,2.72 arc180
  pour VCC (no thermals): 13.57,2.72 arc180 13.83,2.72 arc180
  pour Highspeed1 (no thermals): 12.57,4 arc180 12.72,4 arc180
  pour LowSpeed (no thermals): 12.57,4 arc180 12.72,4 arc180
  pour VCC (no thermals): 12.57,4 arc180 12.72,4 arc180
  pour VCC (no thermals): 1.62,1.55 arc180 1.88,1.55 arc180
  pour LowSpeed (no thermals): 1.62,1.55 arc180 1.88,1.55 arc180
  pour VCC (no thermals): 1.62,1.55 arc180 1.88,1.55 arc180
  pour LowSpeed (no thermals): 5.4,4.06 arc180 5.55,4.06 arc180
  pour VCC (no thermals): 5.4,4.06 arc180 5.55,4.06 arc180
  pour LowSpeed (no thermals): 7.69,4.15 arc180 7.95,4.15 arc180
  pour VCC (no thermals): 7.69,4.15 arc180 7.95,4.15 arc180
  pour LowSpeed (no thermals): 7.69,4.15 arc180 7.95,4.15 arc180
  pour VCC (no thermals): 14.02,5.2 arc180 14.28,5.2 arc180
  pour LowSpeed (no thermals): 14.02,5.2 arc180 14.28,5.2 arc180
  pour LowSpeed (no thermals): 6.31,12.79 arc180 6.71,12.79 arc180
  pour VCC (no thermals): 6.31,12.79 arc180 6.71,12.79 arc180
  pour Highspeed1 (no thermals): 14.27,1.58 arc180 14.52,1.58 arc180
  pour VCC (no thermals): 14.27,1.58 arc180 14.52,1.58 arc180
  pour VCC (no thermals): 14.27,1.58 arc180 14.52,1.58 arc180
+3V3  (via drill 0.1, 0.2)
  Highspeed1 0.2: U1.J8 U1.H9 12.4,9.6 v12.8,9.2 | U1.G8 U1.H7 11,9.6 v10.8,9.8 | U8.3 5.65,5.03 | U13.C3 C63.1 v4.6,5.65 4.89,5.36 C37.1 5.09,5.03 5.65,5.03 | U14.C3 R24.1 C64.1 | U5.25 6.96,8.55 v7.01,8.6 | 5.65,5.03 5.65,4.83 5.6,4.78 5.6,4.54 U8.4 | U9.A1 0.8,7.23 C24.1 0.8,6.67 0.6,6.46 U4.A1
  VCC 0.076: R20.2 2.7,4.39
  VCC 0.1: 5.95,20 5.72,19.77 5.72,18.84 5.79,18.77 5.79,17.75
  VCC 0.2: J1.4 6.25,36.14 6.25,20.3 5.95,20
  LowSpeed 0.076: C64.1 R1.2 7.66,4.49 v7.84,4.49 | R11.2 R15.2 4.68,13.11 v4.76,13.19 | R6.1 v13.7,14.43 | R5.1 10.8,10.1 v10.8,9.8 | R18.1 9.9,11.05 v9.5,11.05 | TP6.TP 9.27,17.86 8.98,17.57 R13.1 | R8.1 4.81,17.22 v4.87,17.28
  LowSpeed 0.1: v1.45,14.5 1.25,14.3 R22.1
  LowSpeed 0.15: 6.6,6.55 6.66,6.56
  LowSpeed 0.2: C2.1 11.75,9 | 11.75,9 C4.1 | 11.75,9 11.75,9.05 arc-90 U1.J8 | 6.6,6.55 U10.3 | 6.6,6.55 6.85,6.55 C27.1 | v11.33,11.97 11.4,11.9 R17.1 | TP6.TP 9.16,17.92 v8.95,18.13 | U6.1 10.98,15.18 C47.1 | U15.C3 15.1,13.48 v15.25,13.63 15.25,13.8 C65.1 | C32.1 7.47,8.17 L3.1 7.37,8.6 v7.01,8.6 6.91,8.5 C35.1 C29.1 5.75,8.2 U10.28 | v10.8,9.8 10.8,9.58 C8.1 | v12.8,9.8 12.8,9.68 C6.1 | L5.1 15.37,9.85 v15.46,9.76 | R3.1 14.78,14.45 v14.8,14.43 | v6.65,6.65 6.65,6.6 6.6,6.55 | v7.1,11.55 7.1,11.82 L2.1
  LowSpeed 0.203: R16.1 v12.99,10.81 v13,10.8 | L1.1 15.33,7.57 v15.29,7.53
  LowSpeed 0.3: C47.1 11.75,15.23
  other vias: 11.8,9.1 7.5,5.9 10.7,9.4 12.6,9.45 2.7,4.1 12.25,15.33 12.5,15.08 12.76,14.9 12.7,14.58 12.1,15.55 12.53,14.79 1.01,7.44
  pour VCC (rank 3, no thermals): 0,18.45 0,4.2 16,4.2 16.05,14.05 16,18.45
  pour LowSpeed (rank 2, no thermals): 11.45,15.4 11.45,14.95 12.2,14.95 12.45,14.7 12.45,14.4 12.9,14.4 12.9,14.95 12.08,15.77 11.85,15.77 11.85,15.4
  pour Highspeed1 (no thermals): 10.72,9.8 arc180 10.88,9.8 arc180
  pour LowSpeed (no thermals): 10.72,9.8 arc180 10.88,9.8 arc180
  pour LowSpeed (no thermals): 10.72,9.8 arc180 10.88,9.8 arc180
  pour Highspeed1 (no thermals): 12.72,9.2 arc180 12.88,9.2 arc180
  pour LowSpeed (no thermals): 12.72,9.8 arc180 12.88,9.8 arc180
  pour Highspeed1 (no thermals): 6.93,8.6 arc180 7.08,8.6 arc180
  pour LowSpeed (no thermals): 6.93,8.6 arc180 7.08,8.6 arc180
  pour LowSpeed (no thermals): 6.93,8.6 arc180 7.08,8.6 arc180
  pour LowSpeed (no thermals): 15.38,9.76 arc180 15.54,9.76 arc180
  pour LowSpeed (no thermals): 15.21,7.53 arc180 15.37,7.53 arc180
  pour LowSpeed (no thermals): 13.62,14.43 arc180 13.78,14.43 arc180
  pour LowSpeed (no thermals): 7.02,11.55 arc180 7.17,11.55 arc180
  pour LowSpeed (no thermals): 1.37,14.5 arc180 1.53,14.5 arc180
  pour Highspeed1 (no thermals): 11.72,9.1 arc180 11.88,9.1 arc180
  pour LowSpeed (no thermals): 11.72,9.1 arc180 11.88,9.1 arc180
  pour Highspeed1 (no thermals): 4.47,5.65 arc180 4.73,5.65 arc180
  pour Highspeed1 (no thermals): 4.47,5.65 arc180 4.73,5.65 arc180
  pour Highspeed1 (no thermals): 7.42,5.9 arc180 7.58,5.9 arc180
  pour Highspeed1 (no thermals): 7.42,5.9 arc180 7.58,5.9 arc180
  pour LowSpeed (no thermals): 6.57,6.65 arc180 6.73,6.65 arc180
  pour LowSpeed (no thermals): 12.92,10.8 arc180 13.08,10.8 arc180
  pour LowSpeed (no thermals): 9.42,11.05 arc180 9.58,11.05 arc180
  pour LowSpeed (no thermals): 7.77,4.49 arc180 7.92,4.49 arc180
  pour VCC (no thermals): 2.62,4.1 arc180 2.78,4.1 arc180
  pour LowSpeed (no thermals): 11.25,11.97 arc180 11.41,11.97 arc180
  pour LowSpeed (no thermals): 8.87,18.13 arc180 9.03,18.13 arc180
  pour LowSpeed (no thermals): 4.68,13.19 arc180 4.83,13.19 arc180
  pour LowSpeed (no thermals): 14.72,14.43 arc180 14.88,14.43 arc180
  pour LowSpeed (no thermals): 15.17,13.63 arc180 15.33,13.63 arc180
  pour LowSpeed (no thermals): 15.17,13.63 arc180 15.33,13.63 arc180
  pour LowSpeed (no thermals): 4.79,17.27 arc180 4.94,17.27 arc180
  pour Highspeed1 (no thermals): 0.93,7.44 arc180 1.09,7.44 arc180
BNO_SCL  (via drill 0.1)
  Highspeed1 0.076: U1.L1 8,7.8 8,5.92 v7.94,5.86
  LowSpeed 0.076: U10.19 1.8,7.05 2.1,6.75 2.1,5.7 2.6,5.2 4.3,5.2 6.21,5.2 6.3,5.11 6.42,5.11 6.45,5.08 6.47,5.08 R1.1 | v7.94,5.86 7.76,5.68 7.76,5.65 7.7,5.59 7.32,5.59 7.24,5.5 7.24,4.99 R1.1 | R1.1 6.86,4.65
  pour Highspeed1 (no thermals): 7.86,5.86 arc180 8.02,5.86 arc180
  pour LowSpeed (no thermals): 7.86,5.86 arc180 8.02,5.86 arc180
BNO_SDA  (via drill 0.1)
  Highspeed1 0.076: v8.95,8.47 8.82,8.6 U1.K2
  Highspeed2 0.076: v8.95,8.47 8.66,8.19 8.66,7.92 8.03,7.29 8.03,6.58 7.65,6.2 7.35,6.2 7,5.85 7,5.59 v6.91,5.5 6.89,5.51 6.41,5.51 | v5.52,5.48 5.6,5.39 6.29,5.39 6.36,5.46 | 6.36,5.46 6.41,5.51 | 6.41,5.51 6.36,5.46
  LowSpeed 0.076: U10.20 1.75,7.55 2.01,7.29 2.01,7.16 2.29,6.88 2.29,5.82 2.73,5.38 5.42,5.38 v5.52,5.48 | R2.1 v6.9,5.49 v6.91,5.5
  pour LowSpeed (no thermals): 5.44,5.48 arc180 5.59,5.48 arc180
  pour Highspeed2 (no thermals): 5.44,5.48 arc180 5.59,5.48 arc180
  pour Highspeed1 (no thermals): 8.87,8.47 arc180 9.03,8.47 arc180
  pour Highspeed2 (no thermals): 8.87,8.47 arc180 9.03,8.47 arc180
  pour Highspeed2 (no thermals): 6.83,5.5 arc180 6.98,5.5 arc180
  pour Highspeed2 (no thermals): 6.83,5.5 arc180 6.98,5.5 arc180
  pour LowSpeed (no thermals): 6.83,5.5 arc180 6.98,5.5 arc180
CAL_A_1KHZ  (via drill 0.1)
  Highspeed1 0.076: U1.N8 11.65,7.25 9.65,7.25 9.43,7.48 9.43,8.53 9.1,8.85 7.95,8.85 7.05,7.94 6.5,7.94 5.99,8.46 v3.98,8.46
  LowSpeed 0.076: R29.1 4.1,8.58 v3.98,8.46
  pour LowSpeed (no thermals): 3.9,8.46 arc180 4.06,8.46 arc180
  pour Highspeed1 (no thermals): 3.9,8.46 arc180 4.06,8.46 arc180
CAL_B_1KHZ  (via drill 0.1)
  Highspeed1 0.076: U1.P14 14.8,6.45 15.05,6.19 15.05,5.92 15.46,5.51 15.46,4.74 R35.1
  other vias: 15.5,4.7
  pour Highspeed1 (no thermals): 15.42,4.7 arc180 15.58,4.7 arc180
CAL_SIGNAL_A  (via drill 0.1)
  Highspeed1 0.076: J3.11 4.4,1.45 3.84,2.01 1.5,2.01 v1.4,2.11
  LowSpeed 0.076: R29.2 R30.1 4.61,8.6 4.26,8.25 1.61,8.25 1.46,8.09 1.46,7.28 1.4,7.22 v1.4,2.11
  pour LowSpeed (no thermals): 1.32,2.11 arc180 1.47,2.11 arc180
  pour Highspeed1 (no thermals): 1.32,2.11 arc180 1.47,2.11 arc180
CAL_SIGNAL_A1
  LowSpeed 0.076: R35.2 R36.1 14.9,4.05 15.11,3.84 15.11,2.2 14.77,1.85 12.15,1.85 11.6,1.3 J5.11
CONF_DONE  (via drill 0.1)
  LowSpeed 0.076: R18.2 10.65,11.1 U1.E6
  other vias: 10.8,11.1
  pour LowSpeed (no thermals): 10.72,11.1 arc180 10.88,11.1 arc180
CONFIG_SEL  (via drill 0.1)
  Highspeed1 0.09: U1.D8
  LowSpeed 0.076: U1.D8 R12.1
  other vias: 11.8,11.6
  pour Highspeed1 (no thermals): 11.73,11.6 arc180 11.88,11.6 arc180
  pour LowSpeed (no thermals): 11.73,11.6 arc180 11.88,11.6 arc180
GND  (via drill 0.1, 0.2, 2.1 pad 3)
  Highspeed1 0.076: U1.R15 15.21,6.19 15.21,6.26 15.06,6.41 v15.06,6.84
  Highspeed1 0.09: v13.3,21.1 TP13.TP
  Highspeed1 0.1: U1.M6 v10.9,7.6 | 8.33,6.35 8.4,6.35 8.58,6.52 8.72,6.52 U1.P2 8.65,6.6 8.4,6.85 8.32,6.85 8.3,6.87
  Highspeed1 0.2: U1.G9 U1.H8 U1.J7 10.85,8.65 C8.2 | U1.D5 U1.E5 U1.E4 | C59.1 v12.06,4.94 | v5.3,3.25 5.3,3.76 5.22,3.84 5.03,3.84 5.03,4.07 4.99,4.07 C37.2
  GND1 0.1: 3.85,19.75 3.85,18
  GND1 0.2: 8.85,19.95 8.78,19.88 8.78,18.82 8.63,18.67 v8.63,18.28
  LowSpeed 0.076: U15.B3 14.96,12.6 14.94,12.58 14.76,12.58 14.74,12.6 U15.B2 | v8.63,18.28 8.66,18.25 8.66,16.94 8.67,16.93 | 8.9,3.91 8.91,3.91 | U10.25 4.51,8.12 4.51,8.15 4.58,8.21 4.85,8.21 5.74,9.1 C29.2
  LowSpeed 0.1: v10.9,7.6 11.23,7.6 C21.2
  LowSpeed 0.127: 8.67,16.93 8.69,16.91 8.69,16.87 8.78,16.78 C28.2
  LowSpeed 0.15: v0.8,12.43 0.98,12.43 R23.1
  LowSpeed 0.2: C6.2 arc-90 12.53,8.4 C4.2 C2.2 10.97,8.4 arc-90 C8.2 | C13.2 v7.5,9.35 C17.2 | 8.14,4.66 v8.13,4.66 | v2,16.7 2,14.56 | v14,16.7 14,14.8 14.22,14.58 14.3,14.58 | C1.2 8.94,12.73 v8.81,12.6 | v5.3,3.25 J5.32 J5.34 J5.36 4.1,3.71 3.95,3.86 C39.1 | U10.25 4.25,7.93 4.45,8.13 | U9.C2 v0.39,6.64 v0.39,6.65
  LowSpeed 0.3: v12.12,13.43 11.8,13.75 C47.2 | U6.PAD 10.83,14.57 U6.2 | C11.1 8.26,4.66 8.14,4.66 | 9.22,3.96 9.26,3.99 9.34,3.99 C56.1
  other vias: 3.58,11.44 4.19,11.42 4.76,11.45 4.8,11 4.2,11 3.6,11 3.6,10.5 3.6,10 4.2,10.5 4.2,10 3.6,9.57 4.2,9.58 12.3,10.1 4.8,10.5 4.8,10 12.6,8.45 13.55,7.21 12.3,11.6 14.25,10.55 14.24,8.21 7.51,11.93 8.3,7.1 8.3,6.1 7.5,6.5 10.85,8.47 9.8,10.1 9.2,9.25 6.54,5.3 6.95,7.4 7.75,7.28 10.3,11.6 13.8,11.1 4.6,7 5.03,5.98 1.78,6.45 9.8,1.18 7.59,2.76 6.66,1.73 2.61,1.3 3.85,15.23 10.5,15.15 0.36,15 6.94,15.81 7.53,14.55 4.52,17.31 10.17,16.06 3.97,15.71 3.22,14.91 2.27,14.53 1.77,14.21 0.92,13.36 3.27,14.11 4.07,14.16 12.82,10.26 11.32,10.71 13.57,8.36 3.17,7.16 11.98,18.08 11.53,18.18 0.68,4.48 3.8,1.34 4.17,7.02 1.06,9.72 0.52,9.87 0.53,11.09 0.5,11.84 0.35,12.65 0.6,14.1 15.48,11.69 15.49,10.56 15.13,8.83 17.77,25.77 14.09,37.57 2.62,39.38 2.31,24.17 9.08,8.23 4.66,14.24 0.56,7.99 7.44,10.35 6.76,8.16 13.55,6.31 18.77,37.77 6.94,15.35 4.46,15.09 6.96,16.27 10.2,16.35 10.15,15.75 0.96,14.5 7.64,14.92 11.2,14.5 10.5,14.65 10.76,14.9 13.2,14.5 14.25,13.45 15.55,15.05 15.2,11.65 4.45,16.67 6.72,13.26 7.74,6.96 6.64,16.62 7.23,14.79 6.84,16.87 4.81,16.01 6.77,14.95 6.32,14.96 7.91,11.3 7.36,18.26 6.1,18.23 6.04,17.38 4.79,18.26 0.28,9.46 3.4,6.3 6.4,4.66 6.07,4.66 6.2,4.43 11.1,14.89 10.88,14.57 10.93,1.59 14.96,0.4 10.72,2.92 9.48,17.17 9.48,16.74 10.18,16.65 11.16,18.32 0.42,10.37 9.67,6.02 9.59,5.77 8.82,7.55 9.91,18.27 1.05,8.32 0.95,5.6 11.34,14.72 10.49,14.89 18.6,22.1 2.2,36.2 4.69,2.52 15.56,0.6 15.66,2.2 15.66,3.3 15.76,5.25 5.21,2.6 3.91,2.55 1.31,1.55 2.01,0.25 1.06,0.25 0.26,0.5 0.26,1.55 0.26,2.3 13.21,2.57 14.3,3.43 14.6,0.95 12.2,1.34 1.69,3.43 2.68,2.93 9,3.93 11.9,3.42 14.14,0.27 4.73,15.65 4.84,15.41
  pour LowSpeed (rank 2): 2.6,12.4 2.6,8.6 5.7,8.6 5.7,11.9 4.1,11.9 4.1,12.4
  pour GND2 (rank 3, no thermals): 0,18.45 0,-11.3 16,-11.3 16.05,14.05 16,18.45
  pour GND1 (rank 3): -42,56.8 -42,-9.7 58,-9.7 58,56.8
  pour LowSpeed (rank 3): 0,18.45 0,-13.35 16,-13.35 16.05,14.05 16,18.45
  pour Highspeed1 (rank 3): 0,18.45 0,-9 16,-9 16.05,14.05 16,18.45
  pour VCC (rank 4): 0,-10.7 16,-10.7 16,4.3 0,4.3
  pour Highspeed1 (no thermals): 12.22,10.1 arc180 12.38,10.1 arc180
  pour LowSpeed (no thermals): 12.67,16.7 arc180 15.33,16.7 arc180
  pour Highspeed1 (no thermals): 13.17,21.1 arc180 13.43,21.1 arc180
  pour LowSpeed (no thermals): 0.67,16.7 arc180 3.33,16.7 arc180
  pour LowSpeed (no thermals): 0.73,12.43 arc180 0.88,12.43 arc180
  pour LowSpeed (no thermals): 10.77,8.47 arc180 10.93,8.47 arc180
  pour Highspeed1 (no thermals): 10.77,8.47 arc180 10.93,8.47 arc180
  pour LowSpeed (no thermals): 7.42,9.35 arc180 7.58,9.35 arc180
  pour LowSpeed (no thermals): 7.42,9.35 arc180 7.58,9.35 arc180
  pour Highspeed1 (no thermals): 10.22,11.6 arc180 10.38,11.6 arc180
  pour LowSpeed (no thermals): 8.05,4.66 arc180 8.21,4.66 arc180
  pour Highspeed1 (no thermals): 11.98,4.94 arc180 12.14,4.94 arc180
  pour LowSpeed (no thermals): 12,13.43 arc180 12.25,13.43 arc180
  pour LowSpeed (no thermals): 8.73,12.6 arc180 8.89,12.6 arc180
  pour GND1 (no thermals): 8.55,18.28 arc180 8.71,18.28 arc180
  pour LowSpeed (no thermals): 8.55,18.28 arc180 8.71,18.28 arc180
  pour LowSpeed (no thermals): 10.82,7.6 arc180 10.98,7.6 arc180
  pour Highspeed1 (no thermals): 10.82,7.6 arc180 10.98,7.6 arc180
  pour Highspeed1 (no thermals): 14.98,6.84 arc180 15.14,6.84 arc180
  pour LowSpeed (no thermals): 5.17,3.25 arc180 5.43,3.25 arc180
  pour Highspeed1 (no thermals): 5.17,3.25 arc180 5.43,3.25 arc180
  pour LowSpeed (no thermals): 0.31,6.65 arc180 0.46,6.65 arc180
I2C_SCL_A  (via drill 0.1)
  Highspeed1 0.076: U1.R9 12.3,5.92 11.48,5.1 11.48,3.94 11.61,3.81 11.61,3.06 11.25,2.7 9.85,2.7 9.65,2.5 v7.8,2.5 6.8,1.5 J3.19
  LowSpeed 0.076: R14.1 6.78,4.08 6.78,3.05 7.33,2.5 v7.8,2.5
  pour LowSpeed (no thermals): 7.72,2.5 arc180 7.88,2.5 arc180
  pour Highspeed1 (no thermals): 7.72,2.5 arc180 7.88,2.5 arc180
  pour Highspeed1 (no thermals): 7.72,2.5 arc180 7.88,2.5 arc180
I2C_SCL_B  (via drill 0.1)
  Highspeed1 0.076: U1.R14 14.84,6.06 v14.84,6.01
  Highspeed2 0.076: v14.84,6.01 14.96,5.89 14.96,4.25 14.84,4.13 v14.84,2.32
  LowSpeed 0.076: v14.84,6.01 15.1,6.01 R7.1 | J5.19 9.25,1 9.25,1.5 10.07,2.32 v14.84,2.32
  pour Highspeed1 (no thermals): 14.76,6.01 arc180 14.92,6.01 arc180
  pour Highspeed2 (no thermals): 14.76,6.01 arc180 14.92,6.01 arc180
  pour LowSpeed (no thermals): 14.76,6.01 arc180 14.92,6.01 arc180
  pour LowSpeed (no thermals): 14.76,2.32 arc180 14.91,2.32 arc180
  pour Highspeed2 (no thermals): 14.76,2.32 arc180 14.91,2.32 arc180
I2C_SDA_A  (via drill 0.1)
  Highspeed1 0.076: 6.5,3.4 J3.18 6.5,3.36 6.18,3.04 v6.18,2.71 | U1.L6 v10.8,8.08
  Highspeed2 0.076: v6.18,2.71 6.18,3.01 6.88,3.72 6.88,4.23 7.76,5.11 8.28,5.11 8.68,5.51 8.93,5.51 9.15,5.74 9.15,6.43 9.38,6.66 9.38,8 9.74,8.36 10.53,8.36 v10.8,8.08
  LowSpeed 0.076: v6.18,2.71 6.2,2.74 6.2,3.78 5.86,4.12 R10.1
  pour Highspeed2 (no thermals): 6.1,2.71 arc180 6.25,2.71 arc180
  pour LowSpeed (no thermals): 6.1,2.71 arc180 6.25,2.71 arc180
  pour Highspeed1 (no thermals): 6.1,2.71 arc180 6.25,2.71 arc180
  pour Highspeed2 (no thermals): 10.72,8.08 arc180 10.88,8.08 arc180
  pour Highspeed1 (no thermals): 10.72,8.08 arc180 10.88,8.08 arc180
I2C_SDA_B  (via drill 0.1)
  Highspeed2 0.076: U1.M8 11.8,7.2 10.9,6.3 10.9,4.95 9.8,3.85 9.8,3.6 v9.2,2.99
  LowSpeed 0.076: 9.5,3.4 J5.18 9.5,3.29 v9.2,2.99 | R4.1 10.75,7.1 10.87,7.23 11.63,7.23 11.8,7.4 U1.M8
  other vias: 11.8,7.6
  pour Highspeed2 (no thermals): 9.12,2.99 arc180 9.27,2.99 arc180
  pour LowSpeed (no thermals): 9.12,2.99 arc180 9.27,2.99 arc180
  pour LowSpeed (no thermals): 11.72,7.6 arc180 11.88,7.6 arc180
  pour Highspeed2 (no thermals): 11.72,7.6 arc180 11.88,7.6 arc180
JTAGEN  (via drill 0.1)
  LowSpeed 0.076: R5.2 U1.G7
  other vias: 11.3,10.1
  pour LowSpeed (no thermals): 11.22,10.1 arc180 11.38,10.1 arc180
LH_DATA0  (via drill 0.1)
  Highspeed2 0.076: U14.C1 6.03,6.02 6.38,6.02 7.2,6.85 7.2,7.5 8.59,8.89 8.79,8.89 8.8,8.9 9.3,8.9 9.51,9.11 9.51,9.29 10.3,10.08 U1.G5
  other vias: 5.9,5.9 10.3,10.1
  pour Highspeed2 (no thermals): 5.82,5.9 arc180 5.98,5.9 arc180
  pour Highspeed2 (no thermals): 10.22,10.1 arc180 10.38,10.1 arc180
LH_DATA1  (via drill 0.1)
  Highspeed1 0.076: U1.H3 9.3,9.73 v9.25,9.78
  Highspeed2 0.076: v9.25,9.78 9.25,9.7 8.87,9.32 8.27,9.32 6.84,7.89 6.43,7.89 5.92,7.38 5.92,7.32 5.79,7.2 5.7,7.2 5.7,7.19 5.1,7.19 4.52,6.62 3.2,6.62 2.88,6.3 2.88,5.82 U13.C1
  other vias: 2.9,5.8
  pour Highspeed2 (no thermals): 2.82,5.8 arc180 2.98,5.8 arc180
  pour Highspeed2 (no thermals): 9.17,9.78 arc180 9.33,9.78 arc180
  pour Highspeed1 (no thermals): 9.17,9.78 arc180 9.33,9.78 arc180
LH_DATA2  (via drill 0.1)
  LowSpeed 0.076: U1.B11 13.8,13.1 U15.C1
  other vias: 13.3,12.6
  pour LowSpeed (no thermals): 13.22,12.6 arc180 13.38,12.6 arc180
LH_ENV0  (via drill 0.1)
  Highspeed1 0.076: v5.8,5.61 6.11,5.61 U14.C2
  Highspeed2 0.076: U1.F5 10.3,10.5 10.54,10.27 10.54,9.95 10.21,9.62 9.85,9.26 9.85,9.09 9.46,8.7 8.8,8.7 7.5,7.4 7.5,6.85 6.51,5.86 6.24,5.86 5.98,5.6 v5.81,5.6 v5.8,5.61
  other vias: 10.3,10.6
  pour Highspeed2 (no thermals): 5.72,5.61 arc180 5.88,5.61 arc180
  pour Highspeed1 (no thermals): 5.72,5.61 arc180 5.88,5.61 arc180
  pour Highspeed2 (no thermals): 10.22,10.6 arc180 10.38,10.6 arc180
LH_ENV1  (via drill 0.1)
  Highspeed1 0.076: U1.J2 v8.7,9.1
  Highspeed2 0.076: U13.C2 3.79,6.19 4.5,6.19 5.26,6.95 5.79,6.95 6.47,7.64 6.94,7.64 8.4,9.1 v8.7,9.1
  other vias: 3.4,5.8
  pour Highspeed2 (no thermals): 3.32,5.8 arc180 3.48,5.8 arc180
  pour Highspeed1 (no thermals): 8.62,9.1 arc180 8.78,9.1 arc180
  pour Highspeed2 (no thermals): 8.62,9.1 arc180 8.78,9.1 arc180
LH_ENV2  (via drill 0.1)
  Highspeed1 0.076: U1.B13 14.35,12.65 v14.35,12.8
  LowSpeed 0.076: U15.C2 14.6,13.05 v14.35,12.8
  pour Highspeed1 (no thermals): 14.27,12.8 arc180 14.43,12.8 arc180
  pour LowSpeed (no thermals): 14.27,12.8 arc180 14.43,12.8 arc180
MIDFILT
  Highspeed1 0.076: R27.1 8.57,13.95 8.22,14.3 L10.2
  Highspeed1 0.5: 8.52,15.88 8.55,15.91 8.55,16.2 | 8.55,16.2 L9.1 8.12,16.22 L10.2 | 8.32,15.97 8.55,16.2
N$1
  LowSpeed 0.076: U12.1 12.25,6 12.12,5.88 U11.3
N$2
  LowSpeed 0.076: R28.1 U12.4
N$3  (via drill 0.1)
  Highspeed1 0.076: v13.9,5.77 13.9,5.33 13.88,5.31 13.88,4.6 14.4,4.09 14.65,4.09 14.89,3.84 14.89,2.8 | 14.89,2.8 14.89,2.75 | 14.89,2.75 14.89,2.7 | J3.35 11.6,1.4 11.78,1.58 12.3,1.58 12.57,1.85 14.04,1.85 14.89,2.71 14.89,2.75 | 14.89,2.75 14.89,2.8
  LowSpeed 0.076: v13.9,5.77 13.71,5.96 R31.2
  pour LowSpeed (no thermals): 13.82,5.77 arc180 13.98,5.77 arc180
  pour Highspeed1 (no thermals): 13.82,5.77 arc180 13.98,5.77 arc180
N$4  (via drill 0.1)
  LowSpeed 0.2: L3.2 8.53,8.67 8.1,9.1 C17.1 C13.1 | C13.1 8.14,9.71 | 8.62,9.9 C20.1 | 8.62,9.9 8.62,9.78 U1.H2 | C13.1 8.47,9.75 8.62,9.9
  other vias: 8.8,9.6
  pour LowSpeed (no thermals): 8.72,9.6 arc180 8.88,9.6 arc180
N$5  (via drill 0.1)
  Highspeed1 0.076: v8.02,1.78 8.2,1.95 10,1.95 10.3,2.25 12.02,2.25 12.33,2.56 12.78,2.56 13.23,3.01 13.3,3.01 13.37,3.09 v13.37,3.89
  Highspeed2 0.076: v4.76,1.43 7.68,1.43 v8.02,1.78
  LowSpeed 0.076: R28.2 13.58,4.2 13.37,3.99 v13.37,3.89 | v4.76,1.43 4.4,1.07 J5.35
  pour Highspeed2 (no thermals): 4.68,1.43 arc180 4.84,1.43 arc180
  pour LowSpeed (no thermals): 4.68,1.43 arc180 4.84,1.43 arc180
  pour LowSpeed (no thermals): 13.3,3.9 arc180 13.45,3.9 arc180
  pour Highspeed1 (no thermals): 13.3,3.9 arc180 13.45,3.9 arc180
  pour Highspeed1 (no thermals): 7.95,1.77 arc180 8.1,1.77 arc180
  pour Highspeed2 (no thermals): 7.95,1.77 arc180 8.1,1.77 arc180
N$6
  LowSpeed 0.076: R31.1 13.55,5.36 13.07,5.84 12.79,5.84 12.65,5.99 U12.2
N$7
  Highspeed1 0.076: 3.7,5 3.7,4.9 | D4.C 3.7,4.8 3.7,5 | 3.7,5 3.7,5.05 3.66,5.09 3.66,6.56 U13.A3
N$8
  Highspeed1 0.076: D4.A 2.45,4.6 3.15,5.3 3.15,6.55 U13.A2
N$9
  Highspeed1 0.2: U13.B1 2.85,6.3 R32.2
N$10
  cutout GND1: 0,16.7 arc-90 2,18.7 arc-90 4,16.7 arc-90 2,14.7 arc-90
N$11
  cutout LowSpeed: 0,16.7 arc-90 2,18.7 arc-90 4,16.7 arc-90 2,14.7 arc-90
N$12
  Highspeed1 0.2: U13.A1 2.7,6.8 C60.1
N$13  (via drill 0.1, 0.3)
  Highspeed1 0.076: L9.2 11.15,16 v11.25,16 | v9.44,15.24 9.44,14.82 R27.2
  Highspeed2 0.076: v11.25,16 10.75,15.5 9.7,15.5 v9.44,15.24
  LowSpeed 0.3: 11.33,16 v11.25,16 L8.1 11.58,16.36 C58.1
  pour LowSpeed (no thermals): 11.05,16 arc180 11.45,16 arc180
  pour LowSpeed (no thermals): 11.05,16 arc180 11.45,16 arc180
  pour Highspeed1 (no thermals): 11.05,16 arc180 11.45,16 arc180
  pour Highspeed2 (no thermals): 11.05,16 arc180 11.45,16 arc180
  pour Highspeed2 (no thermals): 9.36,15.24 arc180 9.52,15.24 arc180
  pour Highspeed1 (no thermals): 9.36,15.24 arc180 9.52,15.24 arc180
N$14  (via drill 0.1)
  Highspeed1 0.076: D5.C 12.8,5.05 v13.25,5.05 | U14.A3 v6.93,6.9 v6.94,6.91
  Highspeed2 0.076: v13.25,5.05 13.25,4.98 12.93,4.65 12.93,2.86 12.13,2.06 10.06,2.06 8.88,0.88 4.62,0.88 4.35,1.15 4.35,4.71 6.54,6.9 v6.93,6.9 v6.94,6.91
  pour Highspeed2 (no thermals): 13.17,5.05 arc180 13.33,5.05 arc180
  pour Highspeed1 (no thermals): 13.17,5.05 arc180 13.33,5.05 arc180
  pour Highspeed2 (no thermals): 6.86,6.91 arc180 7.02,6.91 arc180
  pour Highspeed1 (no thermals): 6.86,6.91 arc180 7.02,6.91 arc180
N$15  (via drill 0.1)
  Highspeed1 0.076: 14.65,4.81 14.57,4.81 14.46,4.7 v14.18,4.7 | 14.65,4.81 14.77,4.7 | v6.5,7.36 6.5,7 U14.A2 | D5.A 14.65,4.85 14.65,4.81
  Highspeed2 0.076: v14.18,4.7 13.19,4.7 13.08,4.59 13.08,4.09 13.08,4.05 13.08,2.8 | v6.5,7.36 6.5,7.07 4.2,4.77 4.2,1.09 4.56,0.72 8.94,0.72 10.13,1.91 12.19,1.91 13.08,2.79 13.08,2.8 | 13.08,2.8
  pour Highspeed1 (no thermals): 14.11,4.7 arc180 14.26,4.7 arc180
  pour Highspeed2 (no thermals): 14.11,4.7 arc180 14.26,4.7 arc180
  pour Highspeed1 (no thermals): 6.42,7.36 arc180 6.58,7.36 arc180
  pour Highspeed2 (no thermals): 6.42,7.36 arc180 6.58,7.36 arc180
N$16
  Highspeed1 0.2: U14.B1 R33.2
N$17
  cutout VCC: 0,16.7 arc-90 2,18.7 arc-90 4,16.7 arc-90 2,14.7 arc-90
N$18
  cutout GND2: 0,16.7 arc-90 2,18.7 arc-90 4,16.7 arc-90 2,14.7 arc-90
N$19
  cutout Highspeed1: 0,16.7 arc-90 2,18.7 arc-90 4,16.7 arc-90 2,14.7 arc-90
N$20
  cutout GND1: 12,16.7 arc-90 14,18.7 arc-90 16,16.7 arc-90 14,14.7 arc-90
N$21
  cutout LowSpeed: 12,16.7 arc-90 14,18.7 arc-90 16,16.7 arc-90 14,14.7 arc-90
N$22
  cutout VCC: 12,16.7 arc-90 14,18.7 arc-90 16,16.7 arc-90 14,14.7 arc-90
N$23
  cutout GND2: 12,16.7 arc-90 14,18.7 arc-90 16,16.7 arc-90 14,14.7 arc-90
N$24
  cutout Highspeed1: 12,16.7 arc-90 14,18.7 arc-90 16,16.7 arc-90 14,14.7 arc-90
N$25
  cutout GND1: 2.65,19.7 2.65,18.5 13.25,18.5 13.25,19.7
N$26  (via drill 0.1)
  Highspeed1 0.076: 12.15,14.5 D6.C 11.95,14 12.46,14 13.05,14 13.75,13.3 13.75,13.01 14.05,12.71 14.05,12.55 | 14.05,12.52 14.05,12.55 | 14.05,12.55 14.05,12.51 14.2,12.36 14.97,12.36 v15.03,12.31
  LowSpeed 0.076: U15.A3 15.1,12.24 v15.03,12.31
  pour LowSpeed (no thermals): 14.95,12.31 arc180 15.11,12.31 arc180
  pour Highspeed1 (no thermals): 14.95,12.31 arc180 15.11,12.31 arc180
N$27  (via drill 0.1)
  Highspeed1 0.076: D6.A 9.95,14.4 10.6,13.75 11.54,13.75 11.55,13.74 12.35,13.74 12.46,13.85 12.52,13.85 12.98,13.85 13.56,13.27 13.56,12.5 13.7,12.36 13.9,12.36 14.06,12.2 14.4,12.2 v14.5,12.1
  LowSpeed 0.076: U15.A2 v14.5,12.1
  pour LowSpeed (no thermals): 14.42,12.1 arc180 14.57,12.1 arc180
  pour Highspeed1 (no thermals): 14.42,12.1 arc180 14.57,12.1 arc180
N$28
  Highspeed1 0.15: 1,11.08 C49.2 C49.2 arc45 0.8,10.62 arc66 1.14,10.1 1.25,10.05 U5.13
N$29
  LowSpeed 0.076: U15.B1 13.5,12 R34.2
N$30  (via drill 0.1)
  Highspeed1 0.076: 1.83,12.12 U5.9 v1.8,12.08
  LowSpeed 0.076: C55.1 R22.2 1.5,12.8 1.5,12.38 v1.8,12.08
  pour LowSpeed (no thermals): 1.72,12.08 arc180 1.88,12.08 arc180
  pour Highspeed1 (no thermals): 1.72,12.08 arc180 1.88,12.08 arc180
N$31  (via drill 0.1)
  Highspeed1 0.15: v1.16,10.6 1.71,10.6 U5.12
  LowSpeed 0.15: C50.2 1.05,10.71 v1.16,10.6
  pour Highspeed1 (no thermals): 1.08,10.6 arc180 1.24,10.6 arc180
  pour LowSpeed (no thermals): 1.08,10.6 arc180 1.24,10.6 arc180
N$32
  LowSpeed 0.15: C50.1 R23.2
N$33  (via drill 0.1)
  Highspeed1 0.076: U5.8 v2.41,12.9
  LowSpeed 0.076: R26.1 R25.2 2.43,13.23 C57.1 2.43,12.88 v2.41,12.9
  pour Highspeed1 (no thermals): 2.33,12.9 arc180 2.49,12.9 arc180
  pour LowSpeed (no thermals): 2.33,12.9 arc180 2.49,12.9 arc180
N$34  (via drill 0.1)
  Highspeed1 0.2: U5.10 2.26,11.55 v2.31,11.6
  LowSpeed 0.076: C44.1 v2.31,11.6
  LowSpeed 0.2: C44.1 C40.1 2.97,12.67 L6.2 3.58,13.05 3.8,13.05 3.89,13.13 C52.1
  pour Highspeed1 (no thermals): 2.23,11.6 arc180 2.38,11.6 arc180
  pour LowSpeed (no thermals): 2.23,11.6 arc180 2.38,11.6 arc180
N$35  (via drill 0.2)
  Highspeed1 0.2: U5.14 v2.23,9.56
  LowSpeed 0.2: C46.1 2.37,9.57 C54.1 2.32,8.95 L7.2 | C46.1 C42.1 | C46.1 2.27,9.6 v2.23,9.56
  pour Highspeed1 (no thermals): 2.1,9.56 arc180 2.35,9.56 arc180
  pour LowSpeed (no thermals): 2.1,9.56 arc180 2.35,9.56 arc180
N$36
  Highspeed1 0.2: U14.A1 5.3,6.9 C61.1
N$37
  LowSpeed 0.2: U15.A1 13.93,11.93 13.93,11.62 13.8,11.5 C62.1
N$38  (via drill 0.2)
  VCC 0.3: v7.86,12.83 8.74,13.71 8.74,14.65 9.12,15.03 v9.12,15.04
  LowSpeed 0.1: 9.9,14.82 9.9,14.78 9.88,14.76
  LowSpeed 0.2: C36.1 9.94,14.44 U6.3 10.07,14.65 9.9,14.82 9.9,14.98 10.07,15.16 U6.4 10.07,15.21 | U3.7 5.83,16.52
  LowSpeed 0.3: U3.8 5.83,16.52 U3.6 5.31,15.82 5.2,15.71 5.2,15.08 5.73,14.55 5.73,13.98 U7.B1 U7.B2 U7.B3 U7.A3 7.89,12.8 v7.86,12.83 | 9.95,13.6 9.94,13.61 C36.1 | v9.12,15.04 9.18,14.98 | C28.1 8.78,15.38 v9.12,15.04 | v9.12,15.04 9.2,14.96 C26.1 9.88,14.76 9.96,14.68